# EAGLE board 2 Digit Decimal counter (EAGLE 9.7.0)

Size 171.58 x 90.18 mm. Coordinates in mm from the lower left corner, seen from the top.
Outline: 0,0 171.57,0 171.57,90.18 0,90.18 0,0
Copper layers (1*16): Top 0.035mm / dielectric 1.5mm / Bottom 0.035mm
Design rules "default": minimum track width 6mil, minimum drill 0.35mm, track to track 6mil, track to pad 6mil, pad to pad 6mil, via to via 6mil, smd to smd 6mil, copper to edge 40mil, drill to drill 6mil, minimum pad ring 10mil, minimum via ring 8mil, stop-mask expansion 4mil, vias tented up to drill 0mil, thermal gap 10mil

## Footprints (pad centres in the part's own frame; a part is rotated, then mirrored left to right if it is on the bottom)
7SEG-13 = drill 0.813 long: 1 -5.08,-7.62; 2 -2.54,-7.62; 3 0,-7.62; 4 2.54,-7.62; 5 5.08,-7.62; 6 5.08,7.62; 7 2.54,7.62; 8 0,7.62; 9 -2.54,7.62; 10 -5.08,7.62
RESAD1016W63L850D250B = drill 0.83 pad 1.43: 1 -5.08,0; 2 5.08,0
SWITCH-MOMENTARY-PTH-6.5MM = drill 1.016 pad 1.88: 1 -3.251,2.261; 2 3.251,2.261; 3 -3.251,-2.261; 4 3.251,-2.261
ARDUINO-UNO-R3-SHIELD = drill 1.016 pad 1.88: 3.3V 24.13,-2.54; 5V 24.13,0; A0 24.13,12.7; A1 24.13,15.24; A2 24.13,17.78; A3 24.13,20.32; A4 24.13,22.86; A5 24.13,25.4; AREF -24.13,-13.97; D2 -24.13,20.32; D3 -24.13,17.78; D4 -24.13,15.24; D5 -24.13,12.7; D6 -24.13,10.16; D7 -24.13,7.62; D8 -24.13,3.81; D9 -24.13,1.27; D10 -24.13,-1.27; D11 -24.13,-3.81; D12 -24.13,-6.35; D13 -24.13,-8.89; GND@0 24.13,2.54; GND@1 24.13,5.08; GND@2 -24.13,-11.43; IOREF 24.13,-7.62; NC 24.13,-10.16; RES 24.13,-5.08; RX -24.13,25.4; SCL -24.13,-19.05; SDA -24.13,-16.51; TX -24.13,22.86; VIN 24.13,7.62

## Placement (x,y rotation side)
DIGIT1  7SEG-CK  [7SEG-13]  134.76,31.88 0 top
DIGIT2  7SEG-CK  [7SEG-13]  116.98,31.88 0 top
R1  220  [RESAD1016W63L850D250B]  96.24,66.4 0 top
R2  220  [RESAD1016W63L850D250B]  96,62.49 0 top
R4  220  [RESAD1016W63L850D250B]  95.94,73.23 0 top
R5  220  [RESAD1016W63L850D250B]  95.98,69.56 0 top
R7  220  [RESAD1016W63L850D250B]  95.94,83.85 0 top
R8  220  [RESAD1016W63L850D250B]  96.03,80.18 0 top
R9  220  [RESAD1016W63L850D250B]  95.99,76.85 0 top
R10  10k  [RESAD1016W63L850D250B]  165.25,14.1 90 top
R11  10k  [RESAD1016W63L850D250B]  155.09,14.1 90 top
S1  SWITCH_MOMENTARY  [SWITCH-MOMENTARY-PTH-6.5MM]  152.54,30.61 90 top
S2  SWITCH_MOMENTARY  [SWITCH-MOMENTARY-PTH-6.5MM]  162.71,30.61 90 top
U1  ARDUINO-UNO-R3-SHIELD  [ARDUINO-UNO-R3-SHIELD]  47.88,29.84 270 top

## Library data of the parts
DIGIT1 DIGIT2 = Tinkercad; CATEGORY: Opto-Electronic; SUB-CATEGORY: Display; TYPE: 7-Segment
R1 R2 R4 R5 R7-R11 S1 S2 U1 = Tinkercad

## Nets
DIGIT1_A: DIGIT1.7 DIGIT2.7 R4.2
DIGIT1_B: DIGIT1.6 DIGIT2.6 R5.2
DIGIT1_C: DIGIT1.4 DIGIT2.4 R7.2
DIGIT1_D: DIGIT1.2 DIGIT2.2 R8.2
DIGIT1_E: DIGIT1.1 DIGIT2.1 R9.2
DIGIT1_F: DIGIT1.9 DIGIT2.9 R2.2
DIGIT1_G: DIGIT1.10 DIGIT2.10 R1.2
U1_5V: S1.1 S1.2 S2.1 S2.2 U1.5V
U1_D2: R4.1 U1.D2
U1_D3: R5.1 U1.D3
U1_D4: R7.1 U1.D4
U1_D5: R8.1 U1.D5
U1_D6: R9.1 U1.D6
U1_D7: R2.1 U1.D7
U1_D8: R1.1 U1.D8
U1_D9: R11.2 S1.3 S1.4 U1.D9
U1_D10: R10.2 S2.3 S2.4 U1.D10
U1_D11: DIGIT2.3 DIGIT2.8 U1.D11
U1_D12: DIGIT1.3 DIGIT1.8 U1.D12
U1_GND: R10.1 R11.1 U1.GND@0 U1.GND@1 U1.GND@2

## Tracks (layer width: path | path; a pad name or v marks a point on that pad's centre or on a via)
DIGIT1_A  (2 unrouted)
DIGIT1_B  (2 unrouted)
DIGIT1_C  (2 unrouted)
DIGIT1_D  (2 unrouted)
DIGIT1_E  (2 unrouted)
DIGIT1_F  (2 unrouted)
DIGIT1_G  (2 unrouted)
U1_5V  (4 unrouted)
U1_D2  (1 unrouted)
U1_D3  (1 unrouted)
U1_D4  (1 unrouted)
U1_D5  (1 unrouted)
U1_D6  (1 unrouted)
U1_D7  (1 unrouted)
U1_D8  (1 unrouted)
U1_D9  (3 unrouted)
U1_D10  (3 unrouted)
U1_D11  (2 unrouted)
U1_D12  (2 unrouted)
U1_GND  (4 unrouted)